# EAGLE board Joystick PCB Electronic Design (EAGLE 9.7.0)
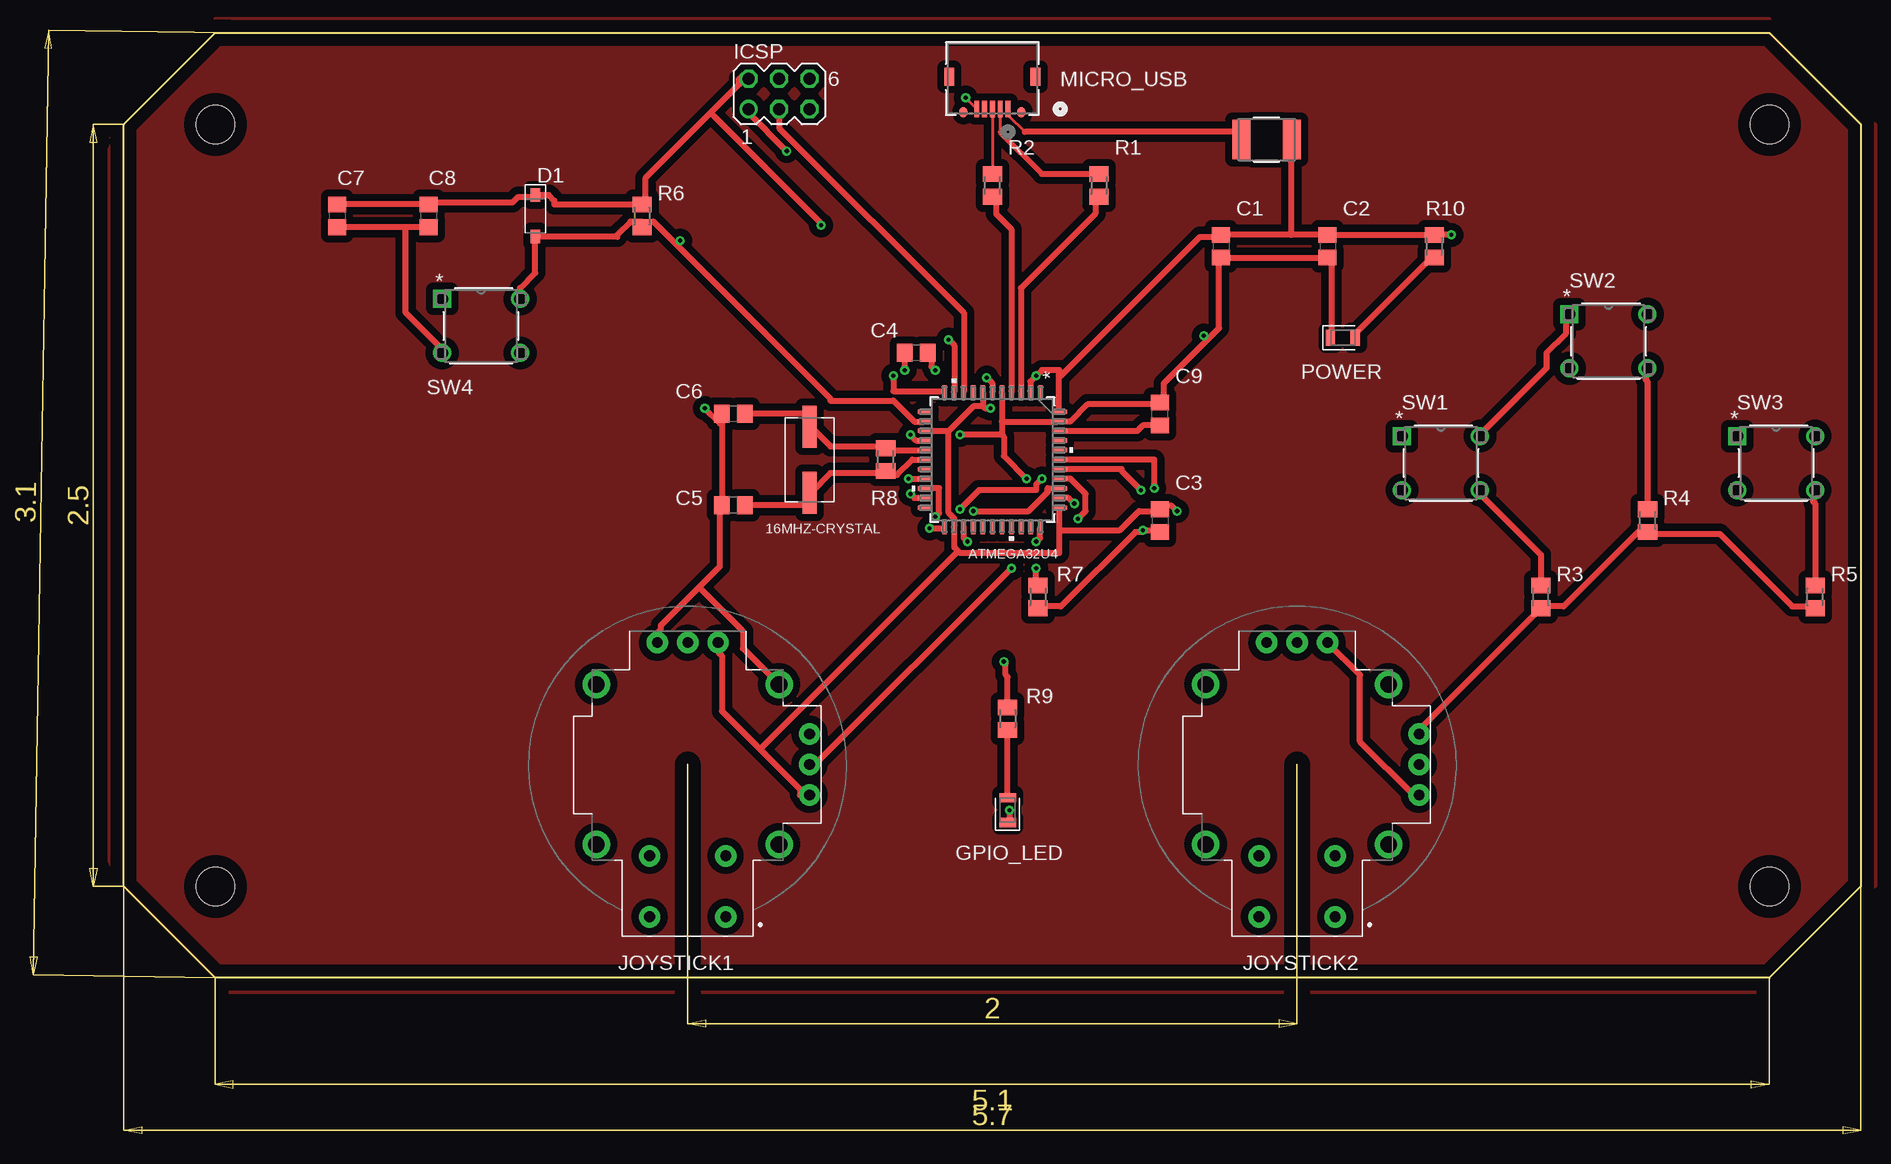
[diagram p0: board, top side]
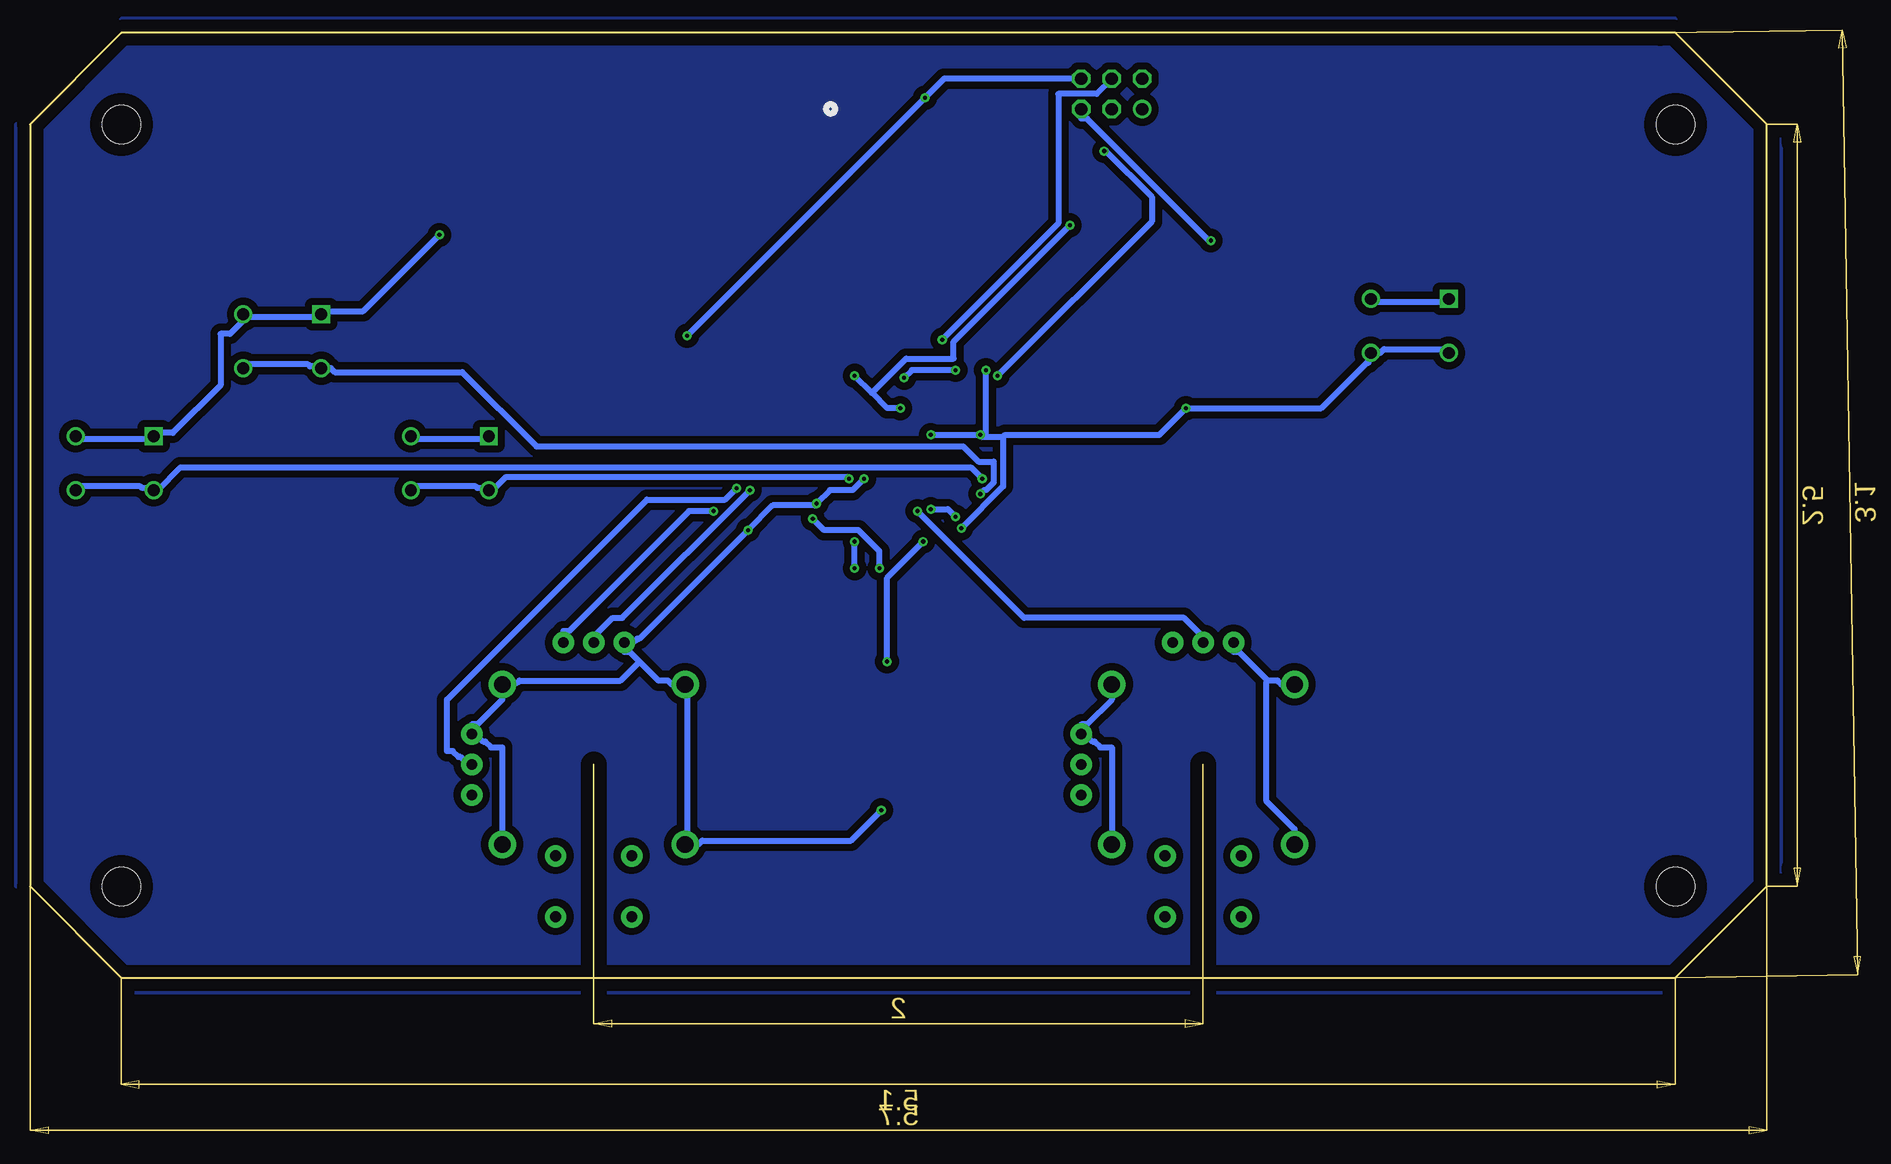
[diagram p1: board, bottom side, seen from below]

Size 144.78 x 78.74 mm. Coordinates in mm from the lower left corner, seen from the top.
Outline: 137.16,78.74 144.78,71.12 144.78,7.62 137.16,0 7.62,0 0,7.62 0,71.12 7.62,78.74 137.16,78.74
Copper layers (1*16): Top / Bottom
Stack-up Default Layer Stack: Top User Defined 0.035mm / Dielectric-1 User Defined 1.5mm / Bottom User Defined 0.035mm
Design rules: minimum drill size 0.35mm, minimum copper width class=0 20mil, minimum copper width 20mil, keepout clearance 0mil, drill distance 6mil, via restrict clearance 0mil, dimension clearance 40mil, restrict clearance 0mil, copper clearance class=0 to class=0 10mil, copper clearance wire_polygon to wire_polygon 6mil, copper clearance wire_polygon to pad_smd 6mil, copper clearance wire_polygon to via 6mil, copper clearance pad_smd to pad_smd 6mil, copper clearance pad_smd to via 6mil, copper clearance via to via 6mil, copper clearance smd to pad (same net) 6mil, copper clearance smd to via (same net) 6mil, copper clearance smd to smd (same net) 6mil
Net classes: 0 default: width 0.508 mm, clearance 0.254 mm
Holes 3.17 mm at 137.16,71.12 7.62,71.12 7.62,7.62 137.16,7.62

## Footprints (pad centres in the part's own frame; a part is rotated, then mirrored left to right if it is on the bottom)
XTAL_ECS-160-20-3X-TR = smd 3.5 x 1.2: 1 -2.75,0; 2 2.75,0
44ML_ATM-L = smd 1.143 x 0.356: 1 -5.626,4; 2 -5.626,3.2; 3 -5.626,2.4; 4 -5.626,1.6; 5 -5.626,0.8; 6 -5.626,0; 7 -5.626,-0.8; 8 -5.626,-1.6; 9 -5.626,-2.4; 10 -5.626,-3.2; 11 -5.626,-4; 23 5.626,-4; 24 5.626,-3.2; 25 5.626,-2.4; 26 5.626,-1.6; 27 5.626,-0.8; 28 5.626,0; 29 5.626,0.8; 30 5.626,1.6; 31 5.626,2.4; 32 5.626,3.2; 33 5.626,4 | smd 0.356 x 1.143: 12 -4,-5.626; 13 -3.2,-5.626; 14 -2.4,-5.626; 15 -1.6,-5.626; 16 -0.8,-5.626; 17 0,-5.626; 18 0.8,-5.626; 19 1.6,-5.626; 20 2.4,-5.626; 21 3.2,-5.626; 22 4,-5.626; 34 4,5.626; 35 3.2,5.626; 36 2.4,5.626; 37 1.6,5.626; 38 0.8,5.626; 39 0,5.626; 40 -0.8,5.626; 41 -1.6,5.626; 42 -2.4,5.626; 43 -3.2,5.626; 44 -4,5.626
C0805 = smd 1.3 x 1.5: 1 -0.95,0; 2 0.95,0
SOD3715X135 = smd 1.127 x 0.784: 1 -1.722,0; 2 1.722,0
FUSE_F050-2 = smd 1.499 x 3.302: 1 -2.095,0; 2 2.095,0
LEDC2012X110N_FLAT-B = smd 0.762 x 1.362: A 1.025,0; C -1.025,0
MA03-2 = drill 1.016: 1 -2.54,-1.27 | drill 1.016 octagon: 2 -2.54,1.27; 3 0,-1.27; 4 0,1.27; 5 2.54,-1.27; 6 2.54,1.27
XDCR_COM-09032 = drill 0.9 pad 1.778: B1A -3.175,12.7; B1B 3.175,12.7; B2A -3.175,7.62; B2B 3.175,7.62 | drill 0.889 pad 1.778: H1 -2.54,-10.16; H2 0,-10.16; H3 2.54,-10.16; V1 -10.16,2.54; V2 -10.16,0; V3 -10.16,-2.54 | drill 1.397 pad 2.286: S1 -7.62,6.668; S2 -7.62,-6.668; S3 7.62,-6.668; S4 7.62,6.668
ZX62D-B-5P8(30)_HIR = smd 0.406 x 1.346: 1 -1.3,2.525; 2 -0.65,2.525; 3 0,2.525; 4 0.65,2.525; 5 1.3,2.525 | smd 0.65 x 0.85: 6 -2.425,2.799; 7 2.425,2.799 | smd 0.813 x 1.499: 8 -3.6,-0.15; 9 3.6,-0.15
M0805 = smd 1.3 x 1.6: 1 -0.95,0; 2 0.95,0
SW4_1825910-A_TEC = drill 0.991 pad 1.499 square: 1 -6.5,4.5 | drill 0.991 pad 1.499: 2 0,4.5; 3 -6.5,0; 4 0,0

## Placement (x,y rotation side)
16MHZ-CRYSTAL  ECS-160-20-3X-TR  [XTAL_ECS-160-20-3X-TR]  57.15,43.18 270 top
ATMEGA32U4  ATMEGA32U4-AU44ML_ATM-L  [44ML_ATM-L]  72.39,43.18 270 top
C1  10uF  [C0805]  91.44,60.96 270 top
C2  0.1uF  [C0805]  100.33,60.96 270 top
C3  0.1uF  [C0805]  86.36,38.1 270 top
C4  0.1uF  [C0805]  66.04,52.07 180 top
C5  20pF  [C0805]  50.8,39.37 180 top
C6  20pF  [C0805]  50.8,46.99 180 top
C7  0.1uF  [C0805]  17.78,63.5 270 top
C8  0.1uF  [C0805]  25.4,63.5 270 top
C9  0.1uF  [C0805]  86.36,46.99 90 top
D1  1N4148W  [SOD3715X135]  34.29,63.5 270 top
FUSE  MF-MSMF050-2FUSE_F050-2  [FUSE_F050-2]  95.25,69.85 0 top
GPIO_LED  LED_BLUE  [LEDC2012X110N_FLAT-B]  73.66,13.97 90 top
ICSP  [MA03-2]  54.61,73.66 0 top
JOYSTICK1  COM-09032  [XDCR_COM-09032]  46.99,17.78 180 top
JOYSTICK2  COM-09032  [XDCR_COM-09032]  97.79,17.78 180 top
MICRO_USB  ZX62D-B-5P8(30)ZX62D-B-5P8(30)_HIR  [ZX62D-B-5P8(30)_HIR]  72.39,74.93 180 top
POWER  LED_BLUE  [LEDC2012X110N_FLAT-B]  101.6,53.34 0 top
R1  22  [M0805]  81.28,66.04 90 top
R2  22  [M0805]  72.39,66.04 270 top
R3  10K  [M0805]  118.11,31.75 270 top
R4  10K  [M0805]  127,38.1 270 top
R5  10K  [M0805]  140.97,31.75 270 top
R6  10K  [M0805]  43.18,63.5 90 top
R7  10K  [M0805]  76.2,31.75 90 top
R8  1M  [M0805]  63.5,43.18 270 top
R9  1K  [M0805]  73.66,21.59 90 top
R10  1K  [M0805]  109.22,60.96 90 top
SW1  1825910-2SW4_1825910-A_TEC  [SW4_1825910-A_TEC]  113.03,40.64 0 top
SW2  1825910-2SW4_1825910-A_TEC  [SW4_1825910-A_TEC]  127,50.8 0 top
SW3  1825910-2SW4_1825910-A_TEC  [SW4_1825910-A_TEC]  140.97,40.64 0 top
SW4  1825910-2SW4_1825910-A_TEC  [SW4_1825910-A_TEC]  33.02,52.07 0 top

## Library data of the parts
16MHZ-CRYSTAL = 16MHz Crystal; MANUFACTURER: ECS INC.; PARTREV: 2017; STANDARD: Manufacturer recommendations
ATMEGA32U4 = ATMEGA32U4 Functional; COPYRIGHT: Copyright (C) 2024 Ultra Librarian. All rights reserved.; MANUFACTURER_PART_NUMBER: ATMEGA32U4-AU; MFR_NAME: Microchip
C1-C9 = rcl; SPICEPREFIX: C
D1 = Diode; CATEGORY: Diode; DESCRIPTION: DIODE GEN PURP 100V 300MA SOD123; MANUFACTURER: Diodes Incorporated; SUB-CATEGORY: Rectifier
FUSE = Fuse; COPYRIGHT: Copyright (C) 2024 Ultra Librarian. All rights reserved.; MANUFACTURER_PART_NUMBER: MF-MSMF050-2; MFR_NAME: Bourns Electronics
GPIO_LED POWER = LED; CATEGORY: LED; COLOR: BLUE; DESCRIPTION: CHIP LED FLAT; SUB-CATEGORY: CHIP; TYPE: FLAT_TOP
ICSP = con-lstb; OC_FARNELL: unknown; OC_NEWARK: unknown
JOYSTICK1 JOYSTICK2 = Analog Joystick Module; AVAILABILITY: In Stock; CHECK_PRICES: https://www.snapeda.com/parts/COM-09032/SparkFun+Electronics/view-part/?ref=eda; DESCRIPTION: Joystick, 2 - Axis Analog (Resistive) Output; MF: SparkFun Electronics; MP: COM-09032; PACKAGE: Package; PRICE: None; PURCHASE-URL: https://www.snapeda.com/api/url_track_click_mouser/?unipart_id=888157&manufacturer=SparkFun Electronics&part_name=COM-09032&search_term=None; SNAPEDA_LINK: https://www.snapeda.com/parts/COM-09032/SparkFun+Electronics/view-part/?ref=snap
MICRO_USB = Microusb; COPYRIGHT: Copyright (C) 2024 Ultra Librarian. All rights reserved.; MANUFACTURER_PART_NUMBER: ZX62D-B-5P8(30); MFR_NAME: Hirose
R1-R10 = rcl; SPICEPREFIX: R
SW1-SW4 = 4-pin Button; COPYRIGHT: Copyright (C) 2024 Ultra Librarian. All rights reserved.; MANUFACTURER_PART_NUMBER: 1825910-2; MFR_NAME: TE Connectivity

## Nets
+5V: ATMEGA32U4.2 ATMEGA32U4.7 ATMEGA32U4.14 ATMEGA32U4.24 ATMEGA32U4.34 ATMEGA32U4.44 C1.1 C2.1 C3.1 C7.1 C8.1 D1.1 FUSE.2 ICSP.2 JOYSTICK1.H1 JOYSTICK1.V1 JOYSTICK2.H1 JOYSTICK2.V1 R6.2 R10.2 SW1.1 SW1.2 SW2.1 SW2.2 SW3.1 SW3.2
A0: ATMEGA32U4.36 JOYSTICK1.H2
A1: ATMEGA32U4.37 JOYSTICK1.V2
A2: ATMEGA32U4.38 JOYSTICK2.H2
A3: ATMEGA32U4.39 JOYSTICK2.V2
AREF: ATMEGA32U4.42 C9.1
D0: ATMEGA32U4.20 R3.1 SW1.3 SW1.4
D1: ATMEGA32U4.21 R4.1 SW2.3 SW2.4
D2: ATMEGA32U4.19 R5.1 SW3.3 SW3.4
D3: ATMEGA32U4.25 R9.2
D+: MICRO_USB.3 R2.1
D-: MICRO_USB.2 R1.2
GND: ATMEGA32U4.5 ATMEGA32U4.15 ATMEGA32U4.23 ATMEGA32U4.35 ATMEGA32U4.43 C1.2 C2.2 C3.2 C4.2 C5.2 C6.2 C7.2 C8.2 C9.2 GPIO_LED.C ICSP.6 JOYSTICK1.H3 JOYSTICK1.S1 JOYSTICK1.S2 JOYSTICK1.S3 JOYSTICK1.S4 JOYSTICK1.V3 JOYSTICK2.H3 JOYSTICK2.S1 JOYSTICK2.S2 JOYSTICK2.S3 JOYSTICK2.S4 JOYSTICK2.V3 MICRO_USB.5 POWER.C R3.2 R4.2 R5.2 R7.1 SW4.3 SW4.4
HWB: ATMEGA32U4.33 R7.2
MISO: ATMEGA32U4.11 ICSP.1
MOSI: ATMEGA32U4.10 ICSP.4
N$3: POWER.A R10.1
NODE: GPIO_LED.A R9.1
RD+: ATMEGA32U4.4 R2.2
RD-: ATMEGA32U4.3 R1.1
RESET: ATMEGA32U4.13 D1.2 ICSP.5 R6.1 SW4.1 SW4.2
SCK: ATMEGA32U4.9 ICSP.3
UCAP: ATMEGA32U4.6 C4.1
VUSB: FUSE.1 MICRO_USB.1
XTAL1: 16MHZ-CRYSTAL.2 ATMEGA32U4.17 C5.1 R8.2
XTAL2: 16MHZ-CRYSTAL.1 ATMEGA32U4.16 C6.1 R8.1

## Tracks (layer width: path | path; a pad name or v marks a point on that pad's centre or on a via)
+5V  (via drill 0.35)
  Top 0.508: C2.1 | 97.31,61.91 100.17,61.91 C2.1 | 97.31,61.91 C1.1 91.28,61.75 89.69,61.75 78.11,50.16 77.95,50.16 | 97.31,61.91 97.31,69.85 FUSE.2 | SW1.2 113.03,45.24 118.59,50.8 118.59,52.07 120.17,53.66 120.17,54.93 120.49,55.24 SW2.1 | C7.1 25.24,64.45 C8.1 25.4,64.61 32.38,64.61 32.86,65.09 34.29,65.09 D1.1 34.45,65.25 35.4,65.25 35.88,64.77 35.88,64.45 R6.2 43.34,64.61 43.5,64.77 43.5,66.67 48.89,72.07 | ICSP.2 51.28,74.93 51.28,74.45 48.89,72.07 | JOYSTICK2.H1 103.03,25.24 103.03,19.68 107.47,15.24 JOYSTICK2.V1 | JOYSTICK1.V1 56.36,15.24 56.36,15.72 53.02,19.05 | 53.02,19.05 49.85,22.23 49.85,26.83 49.53,27.15 JOYSTICK1.H1 | 77.95,50.16 77.95,47.31 ATMEGA32U4.44 | 77.95,50.16 77.95,50.64 76.52,50.64 v76.04,50.16 75.56,49.69 75.56,48.89 ATMEGA32U4.2 | 68.74,45.56 66.83,45.56 ATMEGA32U4.14 | 68.74,45.56 70.8,47.62 71.6,47.62 | 71.6,47.62 71.6,48.74 ATMEGA32U4.7 | v72.23,47.47 71.75,47.47 71.6,47.62 | 69.53,35.56 69.69,35.4 77.95,35.4 77.95,37.31 | 69.53,35.56 69.22,35.88 69.22,37.47 ATMEGA32U4.24 69.22,37.78 69.22,38.26 68.74,38.73 68.74,45.56 | 77.95,37.31 77.95,39.05 ATMEGA32U4.34 | 77.95,37.31 83.03,37.31 84.61,38.89 86.36,38.89 C3.1 86.52,39.21 86.52,39.37 87.31,39.37 v87.79,38.89 | 69.53,35.56 53.02,19.05 | 48.89,72.07 58.1,62.86 v58.1,62.71 | C2.1 R10.2 v110.65,61.91
  Bottom 0.508: SW3.2 140.97,45.09 140.81,44.93 134.78,44.93 134.62,45.09 SW3.1 134.3,45.24 134.14,45.4 132.87,45.4 128.91,49.37 128.91,53.66 128.11,53.66 126.84,54.93 SW2.2 127,55.24 126.84,55.09 120.81,55.09 120.65,55.24 SW2.1 120.49,55.56 117,55.56 v110.65,61.91 | SW1.1 106.68,45.09 106.84,44.93 112.87,44.93 113.03,45.09 SW1.2 | 74.61,48.74 73.34,47.47 v72.23,47.47 | 74.61,48.74 v76.04,50.16 | JOYSTICK2.H1 100.33,28.89 99.85,28.89 89.85,38.89 v87.79,38.89 | v58.1,62.71 67.79,53.02 67.79,51.59 71.75,51.59 74.61,48.74
A0  (via drill 0.35)
  Top 0.508: v70.8,38.89 75.41,38.89 76.99,40.48 76.99,40.8 77.95,40.8 ATMEGA32U4.36
  Bottom 0.508: v70.8,38.89 61.91,30 48.58,30 46.99,28.42 JOYSTICK1.H2
A1  (via drill 0.35)
  Top 0.508: v79.53,38.26 80.17,38.89 80.17,40.32 78.9,41.59 78.11,41.59 ATMEGA32U4.37 | v73.98,34.13 57.63,17.78 JOYSTICK1.V2
  Bottom 0.508: v79.53,38.26 78.58,37.31 75.72,37.31 73.98,35.56 v73.98,34.13
A2  (via drill 0.35)
  Top 0.508: v84.77,40.64 83.19,42.23 83.19,42.39 78.11,42.39 ATMEGA32U4.38
  Bottom 0.508: v84.77,40.64 95.41,30 96.2,30 97.79,28.42 JOYSTICK2.H2
A3  (via drill 0.35)
  Top 0.508: ATMEGA32U4.39 85.88,43.18 v85.88,40.8
  Bottom 0.508: v85.88,40.8 86.84,39.85 93.34,39.85 110.01,23.18 110.01,18.89 109.54,18.89 109.06,18.41 108.9,18.41 108.27,17.78 JOYSTICK2.V2
AREF
  Top 0.508: ATMEGA32U4.42 78.11,45.56 84.45,45.56 84.93,46.04 C9.1
D0  (via drill 0.35)
  Top 0.508: R3.1 118.11,35.24 113.03,40.32 SW1.4 | v67.63,38.42 67.94,38.73 67.94,40.8 66.83,40.8 ATMEGA32U4.20 | v69.69,39.05 71.28,40.64 76.04,40.64 76.04,41.12 v76.52,41.59
  Bottom 0.508: v67.63,38.42 68.26,39.05 v69.69,39.05 | v76.52,41.59 76.68,41.75 105.09,41.75 106.2,40.64 SW1.3 106.68,40.8 107.47,40.8 107.63,40.96 112.71,40.96 SW1.4
D1  (via drill 0.35)
  Top 0.508: R4.1 127,49.69 126.84,49.85 126.84,50.64 SW2.4 | v65.56,40.32 65.88,40.01 66.67,40.01 ATMEGA32U4.21
  Bottom 0.508: v65.56,40.32 65.25,40.64 65.09,40.64 64.45,41.27 64.45,43.02 65.72,43.02 66.99,44.29 102.55,44.29 108.74,50.48 119.38,50.48 119.7,50.8 SW2.3 120.65,50.96 121.44,50.96 121.6,51.12 126.68,51.12 SW2.4
D2  (via drill 0.35)
  Top 0.508: R5.1 140.97,39.53 140.81,39.69 140.81,40.48 SW3.4 | v65.41,41.59 66.67,41.59 ATMEGA32U4.19
  Bottom 0.508: v65.41,41.59 66.36,42.55 132.24,42.55 134.14,40.64 SW3.3 134.62,40.8 135.41,40.8 135.57,40.96 140.65,40.96 SW3.4
D3  (via drill 0.35)
  Top 0.508: v70.33,36.35 70.01,36.67 70.01,37.47 ATMEGA32U4.25 | v73.34,26.35 73.5,26.19 73.5,25.24 73.66,25.08 R9.2
  Bottom 0.508: v70.33,36.35 73.34,33.34 v73.34,26.35
D+
  Top 0.254: MICRO_USB.3 R2.1
D-
  Top 0.254: MICRO_USB.2 73.04,70.47
  Top 0.406: 73.04,70.47 76.52,66.99
  Top 0.508: 76.52,66.99 R1.2
GND  (via drill 0.35)
  Top 0.254: v70.17,73.34 70.96,72.55 MICRO_USB.5
  Top 0.508: 23.49,62.55 C8.2 | 23.49,62.55 C7.2 | 23.49,62.55 23.49,55.4 26.51,52.39 SW4.3 | 49.85,46.2 C6.2 | 49.85,46.2 C5.2 49.69,39.21 49.69,34.29 47.94,32.54 | 47.94,32.54 44.77,29.37 44.77,29.05 44.45,28.73 JOYSTICK1.H3 | JOYSTICK1.S2 51.59,27.46 51.59,28.89 47.94,32.54 | v48.42,47.47 49.69,46.2 49.85,46.2 | POWER.C 100.65,53.34 100.65,59.69 C2.2 100.17,60.01 C1.2 91.28,59.85 91.28,54.13 90.33,53.18 | v65.56,45.24 66.04,44.77 66.67,44.77 ATMEGA32U4.15 | 73.18,45.24 v69.69,45.24 | 73.18,46.35 73.18,48.74 ATMEGA32U4.5 | 73.18,46.35 73.18,45.24 | v67.15,37.47 68.26,37.47 ATMEGA32U4.23 | v79.22,39.53 78.74,40.01 78.11,40.01 ATMEGA32U4.35 | v75.25,41.59 73.34,43.5 73.34,45.09 73.18,45.24 | v65.09,50.64 C4.2 | C3.2 86.36,37.31 v84.93,37.31 84.77,37.15 84.3,37.15 78.11,30.96 76.2,30.96 R7.1 | 73.18,46.35 77.79,46.35 ATMEGA32U4.43 78.11,46.35 78.9,46.35 80.33,47.78 86.36,47.78 C9.2 86.52,48.1 86.68,48.26 86.68,49.53 90.33,53.18 | v90.01,53.5 90.33,53.18 | R5.2 140.97,30.96 139.06,30.96 133.03,36.99 127.16,36.99 R4.2 126.21,37.15 120.02,30.96 118.11,30.96 R3.2 117.95,30.64 107.95,20.64 JOYSTICK2.V3 | v73.82,13.97 73.82,13.18 73.66,13.02 GPIO_LED.C
  Bottom 0.508: SW4.3 26.67,52.07 26.99,52.39 31.91,52.39 32.23,52.07 SW4.4 33.18,51.91 33.18,51.28 33.34,51.28 37.15,47.47 v48.42,47.47 50.64,45.24 63.5,45.24 63.66,45.09 | JOYSTICK1.S2 54.61,23.18 56.67,21.11 57.15,21.11 JOYSTICK1.V3 56.99,20.16 56.67,20.16 56.2,19.68 56.04,19.68 55.56,19.21 54.61,19.21 JOYSTICK1.S1 | JOYSTICK1.H3 44.45,27.15 43.97,27.15 41.59,24.77 | 41.59,24.77 40.8,24.77 40.48,24.45 JOYSTICK1.S3 | JOYSTICK1.S4 39.37,12.38 41.75,14.76 41.75,24.61 41.59,24.77 | ICSP.6 68.58,74.93 v70.17,73.34 v90.01,53.5 | v69.69,45.24 v65.56,45.24 65.41,45.09 65.09,45.09 | v67.15,37.47 63.66,40.96 63.66,45.09 | 65.09,45.09 63.66,45.09 | v75.25,41.59 76.2,40.64 78.11,40.64 v79.22,39.53 79.38,39.37 82.87,39.37 v84.93,37.31 93.98,28.26 94.14,28.26 94.3,28.1 95.09,28.1 JOYSTICK2.H3 95.25,27.15 94.77,27.15 93.98,26.35 | 65.09,45.09 v65.09,50.64 | v73.82,13.97 76.36,11.43 88.74,11.43 89.06,11.11 JOYSTICK2.S4 90.01,11.27 90.01,24.29 JOYSTICK2.S3 91.28,24.45 91.6,24.77 92.39,24.77 93.98,26.35 | JOYSTICK2.S1 105.41,19.21 106.36,19.21 106.84,19.68 107,19.68 107.47,20.16 107.79,20.16 JOYSTICK2.V3 107.95,21.11 107.47,21.11 105.41,23.18 JOYSTICK2.S2 105.25,24.61 104.14,24.61 103.98,24.77 95.57,24.77 93.98,26.35
HWB  (via drill 0.35)
  Top 0.508: v76.04,36.35 76.36,36.67 76.36,37.47 ATMEGA32U4.33 | v76.04,34.13 76.04,32.86 R7.2
  Bottom 0.508: v76.04,34.13 v76.04,36.35
MISO  (via drill 0.35)
  Top 0.508: v64.14,50.16 64.14,48.89 68.26,48.89 ATMEGA32U4.11 | v55.25,68.9 52.07,72.07 ICSP.1
  Bottom 0.508: v64.14,50.16 51.28,63.02 51.28,65.09 55.09,68.9 v55.25,68.9
MOSI  (via drill 0.35)
  Top 0.508: v68.74,53.18 69.22,52.7 69.22,48.89 ATMEGA32U4.10
  Bottom 0.508: v68.74,53.18 59.05,62.86 59.05,73.66 55.88,73.66 ICSP.4
N$1
  pour Top (isolate 0.61): 7.62,80.01 137.16,80.01 146.05,71.12 146.05,7.62 137.16,-1.27 7.62,-1.27 -1.27,7.62 -1.27,71.12
N$3
  Top 0.508: 102.71,53.34 POWER.A 102.62,53.64 109,60.01 R10.1 109.14,59.93
NODE
  Top 0.508: GPIO_LED.A R9.1
RD+
  Top 0.508: ATMEGA32U4.4 73.98,48.89 73.98,62.39 72.71,63.66 72.71,64.77 R2.2
RD-
  Top 0.508: ATMEGA32U4.3 74.77,48.89 74.77,57.47 80.96,63.66 80.96,64.77 R1.1
RESET  (via drill 0.35)
  Top 0.508: SW4.2 33.02,57.47 34.29,58.74 D1.2 34.45,61.75 41.12,61.75 41.12,61.91 42.23,63.02 43.02,63.02 R6.1 43.18,63.02 44.13,63.02 46.04,61.12 | 46.04,61.12 58.9,48.26 58.9,48.1 64.14,48.1 65.88,46.35 66.67,46.35 ATMEGA32U4.13 | v46.36,61.44 46.04,61.12
  Bottom 0.508: SW4.1 26.67,56.52 26.83,56.36 32.86,56.36 33.02,56.52 SW4.2 | ICSP.5 57.15,71.6 56.67,71.6 46.51,61.44 v46.36,61.44
SCK
  Top 0.508: ICSP.3 54.61,70.8 70.01,55.4 70.01,48.89 ATMEGA32U4.9
UCAP  (via drill 0.35)
  Top 0.508: ATMEGA32U4.6 72.39,49.53 v71.91,50.01 | v67.63,50.64 67.31,50.96 67.31,51.75 C4.1
  Bottom 0.508: v71.91,50.01 71.28,50.64 v67.63,50.64
UGND
  pour Bottom (isolate 0.61): 7.62,80.01 137.16,80.01 146.05,71.12 146.05,7.62 137.16,-1.27 7.62,-1.27 -1.27,7.62 -1.27,71.12
VUSB
  Top 0.254: MICRO_USB.1 73.69,71.88 75.09,70.48
  Top 0.508: 75.09,70.48 93.03,70.48 93.03,69.85 FUSE.1
XTAL1
  Top 0.508: ATMEGA32U4.17 65.72,43.18 64.45,41.91 63.5,41.91 R8.2 63.34,42.07 58.9,42.07 57.31,40.48 16MHZ-CRYSTAL.2 57.15,39.37 C5.1
XTAL2
  Top 0.508: ATMEGA32U4.16 66.67,43.97 63.5,43.97 R8.1 63.34,44.29 58.9,44.29 57.31,45.88 16MHZ-CRYSTAL.1 57.15,46.99 C6.1